# Altium PCB PCB.PcbDoc
Units mil, origin at the board's own origin, x right, y up, seen from the top; angles counter-clockwise.
Board outline 840 x 1200 mil, 2 copper layers (Top Layer, Bottom Layer); 6 components, 7 nets, 32 pads, 0 vias.
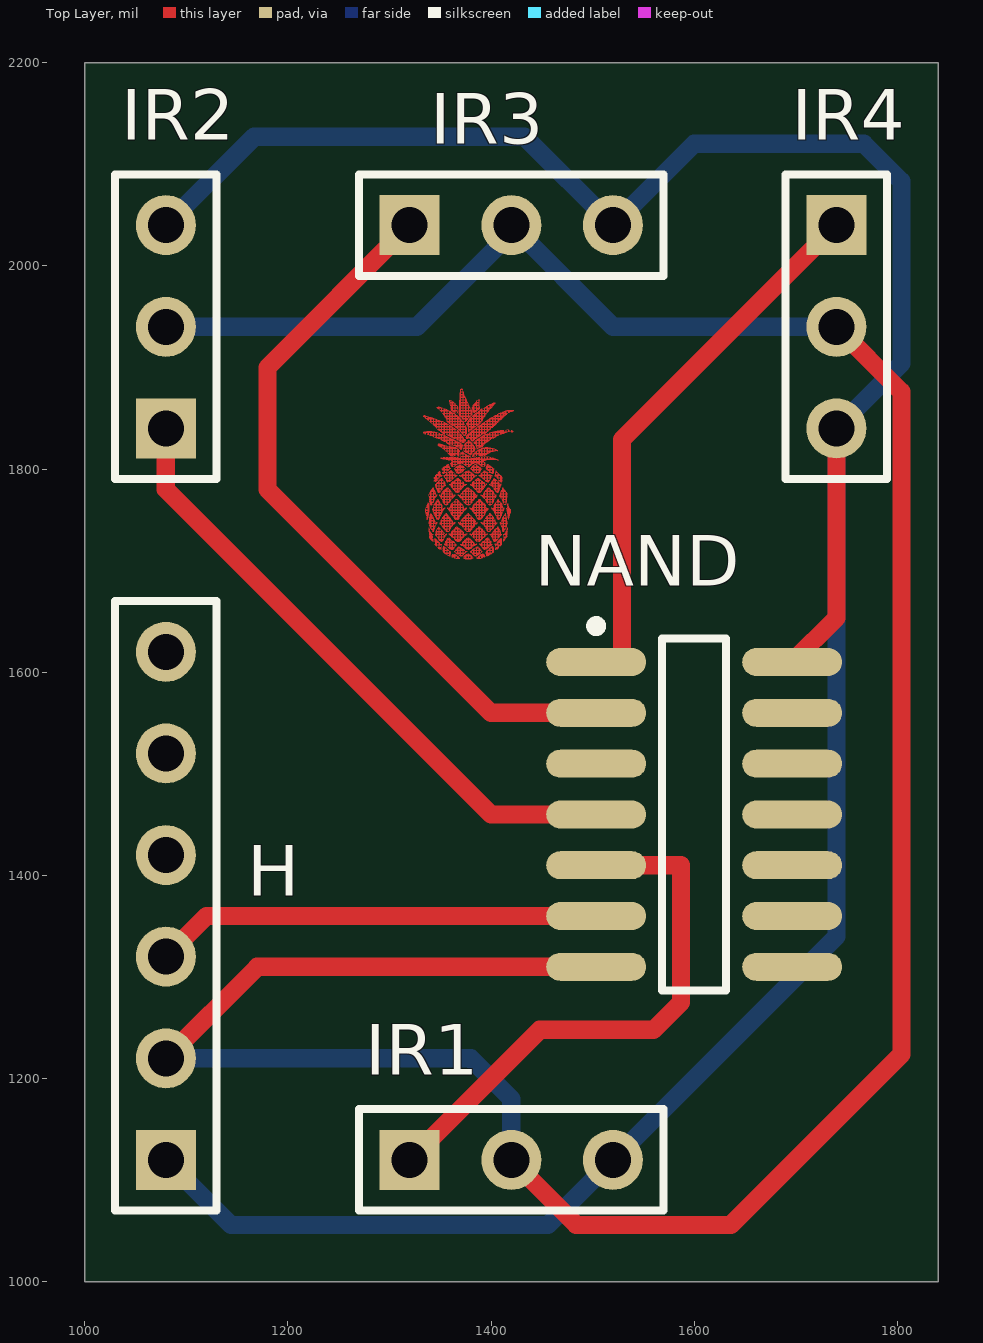
[diagram p0: Top Layer view]
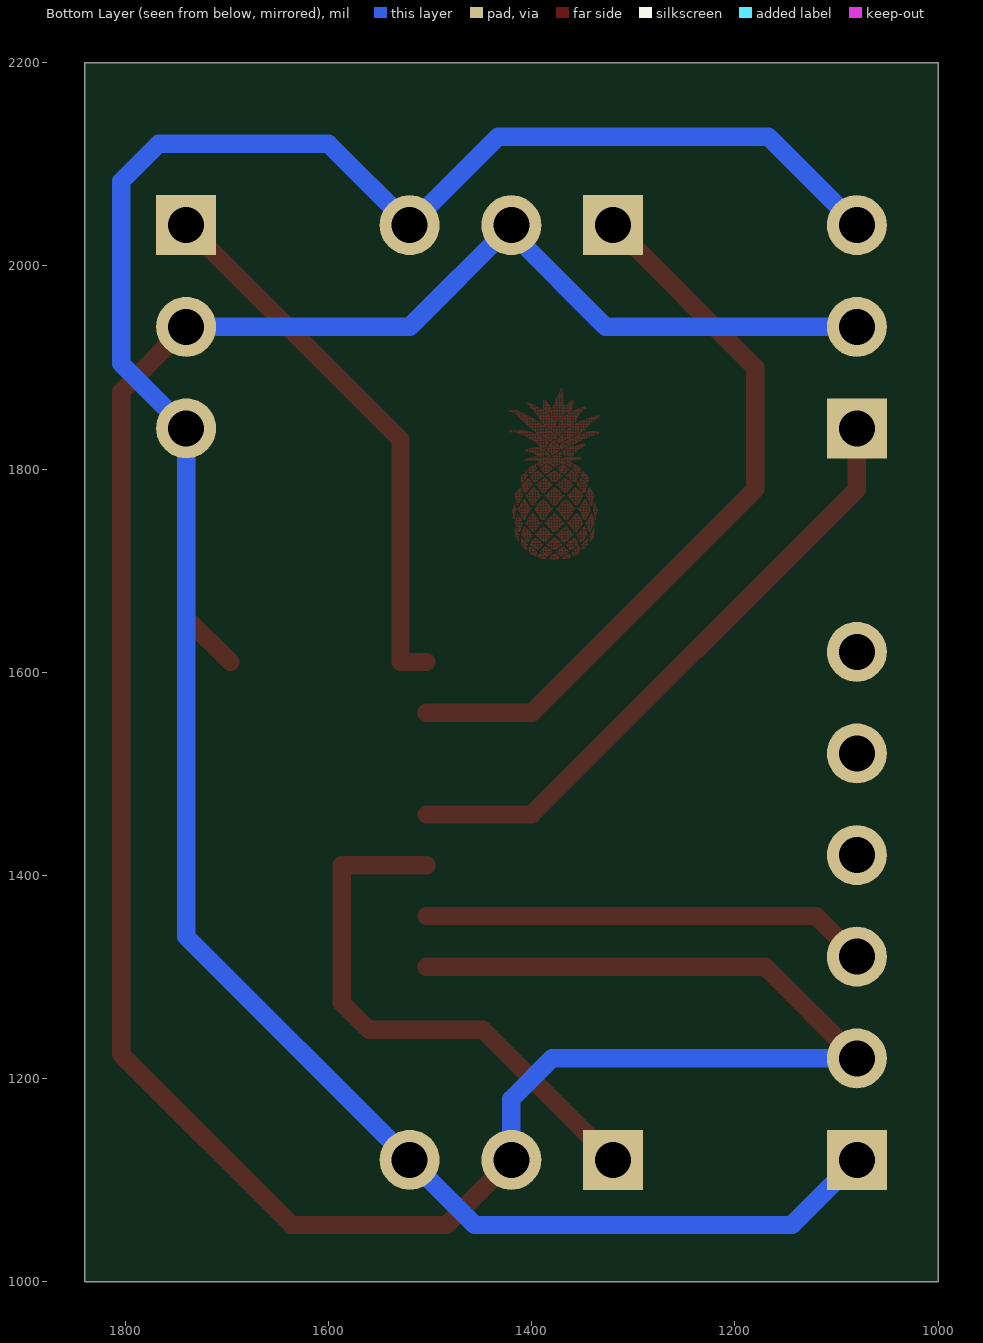
[diagram p1: Bottom Layer view, seen from below]

## Layer stack, top to bottom
Top Solder: solder mask 0.4, Solder Resist, Dk 3.5
Top Layer: signal copper 1.4
Dielectric 1: dielectric 12.6, FR-4, Dk 4.8
Bottom Layer: signal copper 1.4
Bottom Solder: solder mask 0.4, Solder Resist, Dk 3.5

## Board outline
1000,1000 1840,1000 1840,2200 1000,2200

## Design rules (kind name [scope] priority, off if disabled: settings)
Clearance [All] p1: gap=25 except(15: SMDPad-SMDPad SMDPad-THPad THPad-THPad; 30: Track-Track)
PolygonConnect [All] p1: connectstyle=Relief reliefconductorwidth=10 reliefentries=4 polygonreliefangle="90 Angle" airgapwidth=10
RoomDefinition Schematic [InComponentClass('Schematic')] p1: confinementstyle=ConfineIn formatcopy=TRUE lockcomponents=FALSE outline 1000,1000 1840,1000 1840,2200 1000,2200
RoutingVias [All] p1: holewidth=28 width=50 viastyle="Through Hole" minholewidth=28 minwidth=50 maxholewidth=28 maxwidth=50
SMDNeckDown [All] p1: percent=75.000
SolderMaskExpansion [All] p1: expansion=4
Width [All] p1: maxlimit=20 minlimit=18 preferedwidth=18
30 further rules are at their usual default settings.

## Components (designator, comment, footprint, x,y, rotation, side; value= is the part's Value field where it differs from the comment)
H "Header 6" HDR1X6 1080,1120 r90 top (schematic designator HEADER)
IR1 "Header 3" HDR1X3 1320,1120 r0 top
IR2 "Header 3" HDR1X3 1080,1840 r90 top
IR3 "Header 3" HDR1X3 1320,2040 r0 top
IR4 "Header 3" HDR1X3 1740,2040 r270 top
NAND "SN74F20D" D014_M 1600,1460 r0 top

## Footprints (in the part's own frame and the unit in brackets; to place one, negate y for a bottom-side part, rotate by r counter-clockwise, add the part's x,y. Pads: shape width x height; smd on the part's side, far side on the other; paste and mask are expansions set on the pad)
D014_M [mm] "SOIC, 14-Leads, Body 8.7x3.9mm, Pitch 1.27mm, IPC Low Density"
  oval 2.5x0.7 smd: 1(-2.45,3.81) 2(-2.45,2.54) 3(-2.45,1.27) 4(-2.45,0) 5(-2.45,-1.27) 6(-2.45,-2.54) 7(-2.45,-3.81) 8(2.45,-3.81) 9(2.45,-2.54) 10(2.45,-1.27) 11(2.45,0) 12(2.45,1.27) 13(2.45,2.54) 14(2.45,3.81)
  silkscreen extent -2.57,-4.4 0.8,4.83, body extent -2,-4.38 2,4.38, height 1.75
HDR1X3 [mm] "Connector; Header; 3 Position"
  rect 1.5x1.5 hole 0.9: 1(0,0)
  round 1.5 hole 0.9: 2(2.54,0) 3(5.08,0)
  silkscreen extent -1.27,-1.27 6.35,1.27
HDR1X6 [mm] "Connector; Header; 6 Position"
  rect 1.5x1.5 hole 0.9: 1(0,0)
  round 1.5 hole 0.9: 2(2.54,0) 3(5.08,0) 4(7.62,0) 5(10.16,0) 6(12.7,0)
  silkscreen extent -1.27,-1.27 13.97,1.27

## Part data
H: "Header, 6-Pin"
IR1 IR2 IR3 IR4: "Header, 3-Pin"
NAND: "Dual 4-Input Positive-NAND Gate"

## Nets (pads, with @x,y where several pads share a name; then routed paths per layer and width w, separated by ;. In a path a pad name is that pad's centre, name@x,y a point inside that pad or via, vN(x,y) a via of type N, cw(c..) or ccw(c..) an arc to the next point about the centre after c; other vN are vias at no path point)
NetHEADER_1: H.1 IR1.3 IR2.3 IR3.3 IR4.3 NAND.14 | length 2666.3
  Top Layer w18: NAND.14 1740,1653.54 IR4.3
  Bottom Layer w18: H.1 1144,1056 1456,1056 IR1.3 1740,1340 IR4.3 1804,1904 1804,2083.14 1767.14,2120 1600,2120 IR3.3 1433,2127 1167,2127 IR2.3
NetHEADER_2: H.2 IR1.2 IR2.2 IR3.2 IR4.2 NAND.7 | length 2847
  Top Layer w18: H.2 1170,1310 NAND.7 ; IR1.2 1484,1056 1636,1056 1804,1224 1804,1876 IR4.2
  Bottom Layer w18: H.2 1380,1220 1420,1180 IR1.2 ; IR2.2 1327.14,1940 1420,2032.86 IR3.2 1520,1940 IR4.2
NetHEADER_3: H.3 NAND.6 | length 440.1
  Top Layer w18: H.3 1120,1360 NAND.6
NetIR1_1: IR1.1 NAND.5 | length 549.7
  Top Layer w18: IR1.1 1448,1248 1560,1248 1587,1275 1587,1410 NAND.5
NetIR2_1: IR2.1 NAND.4 | length 616.1
  Top Layer w18: IR2.1 1080,1780 1400,1460 NAND.4
NetIR3_1: IR3.1 NAND.2 | length 732.7
  Top Layer w18: IR3.1 1180,1900 1180,1780 1400,1560 NAND.2
NetIR4_1: IR4.1 NAND.1 | length 542.9
  Top Layer w18: NAND.1 1529,1610 1529,1829 IR4.1
pads on no net: H.4 H.5 H.6 NAND.3 NAND.8 NAND.9 NAND.10 NAND.11 NAND.12 NAND.13

## Other copper
Top Layer:
  drawing of 63 lines, arcs and shapes, not listed